# Altium PCB 移相器PCB1.PcbDoc
Units mil, origin at the board's own origin, x right, y up, seen from the top; angles counter-clockwise.
Board outline 2000 x 1150 mil, 2 copper layers (Top Layer, Bottom Layer); 29 components, 12 nets, 71 pads, 66 vias.
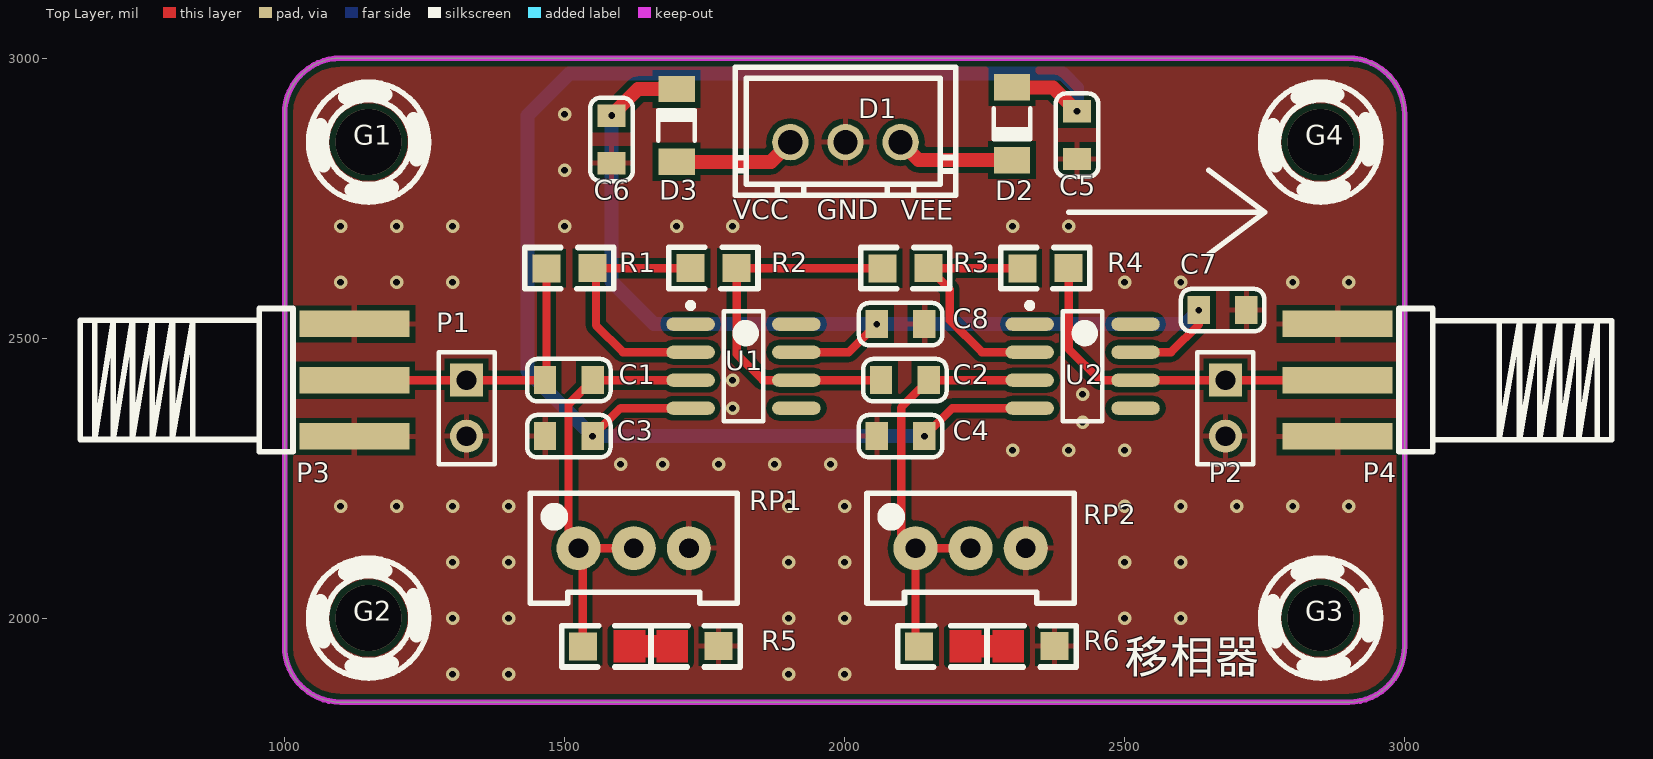
[diagram p0: Top Layer view]
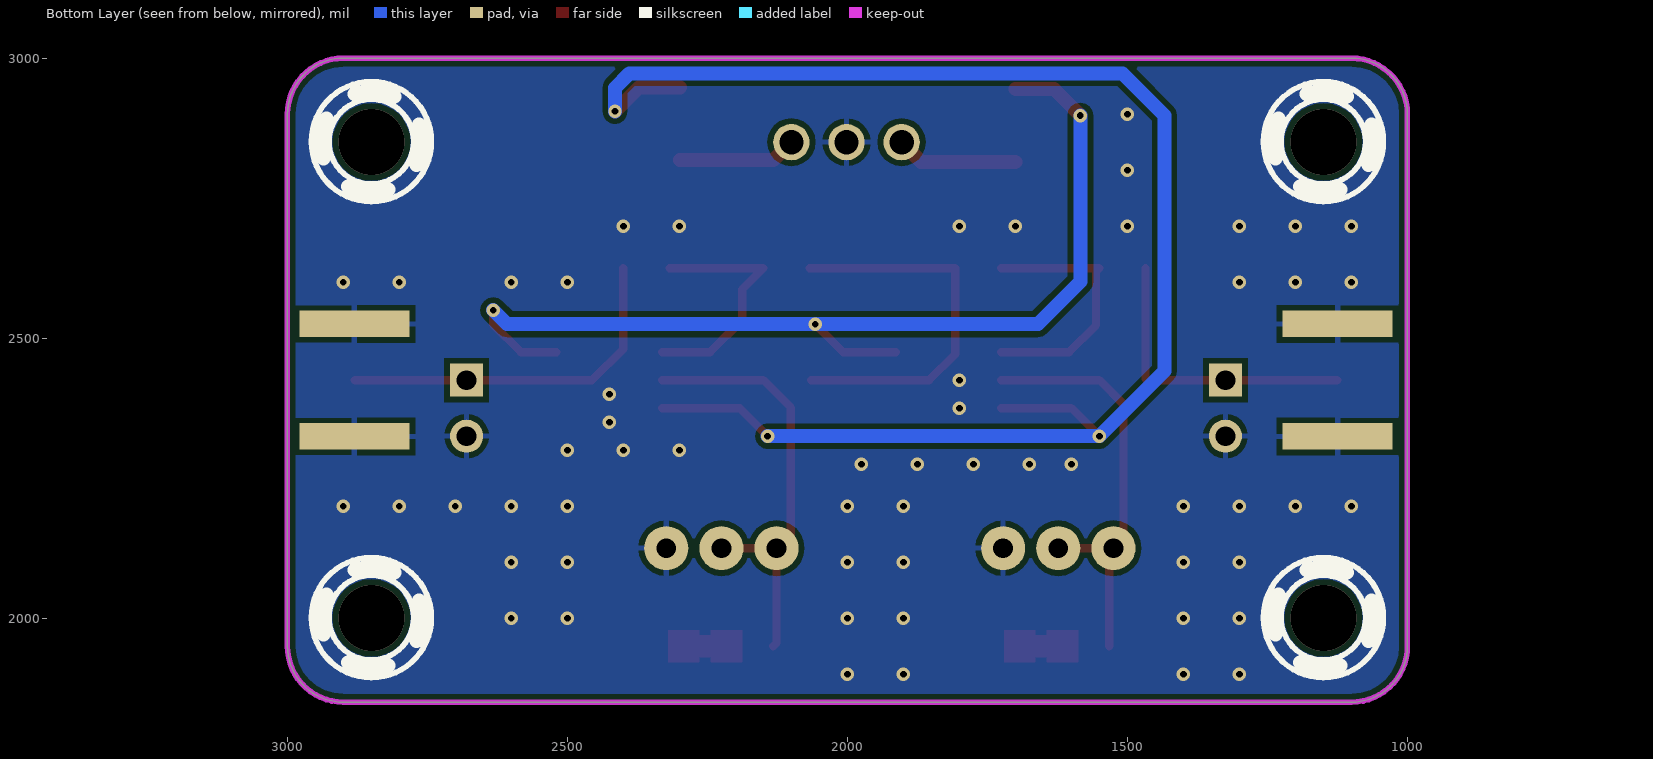
[diagram p1: Bottom Layer view, seen from below]

## Layer stack, top to bottom
Top Solder: solder mask 0.4, Solder Resist, Dk 3.5
Top Layer: signal copper 1.4
Dielectric 1: dielectric 12.6, FR-4, Dk 4.8
Bottom Layer: signal copper 1.4
Bottom Solder: solder mask 0.4, Solder Resist, Dk 3.5

## Board outline
1000,1950 1000,2900 cw(c1100,2900) 1100,3000 2900,3000 cw(c2900,2900) 3000,2900 3000,1950 cw(c2900,1950) 2900,1850 1100,1850 cw(c1100,1950)

## Design rules (kind name [scope] priority, off if disabled: settings)
Clearance [All] p1: gap=10 ignorepadtopadclearanceinfootprint=FALSE except(0: Arc-Hole Track-Hole SMDPad-Hole THPad-Hole Via-Hole Fill-Hole Poly-Hole Region-Hole Text-Hole)
PolygonConnect [All] p1: connectstyle=Relief reliefconductorwidth=10 reliefentries=4 polygonreliefangle="90 Angle" airgapwidth=10
RoutingVias [All] p1: holewidth=28 width=50 viastyle="Through Hole" minholewidth=28 minwidth=50 maxholewidth=28 maxwidth=50
SolderMaskExpansion [All] p1: expansion=4 istentingtop=FALSE
Width [All] p1: maxlimit=25 minlimit=15 preferedwidth=15
30 further rules are at their usual default settings.

## Components (designator, comment, footprint, x,y, rotation, side; value= is the part's Value field where it differs from the comment)
C1 "104" 电容0805 1507.5,2425 r180 top
C2 "104" 电容0805 2107.5,2425 r180 top
C3 "104" 电容0805 1507.5,2325 r0 top
C4 "104" 电容0805 2100,2325 r0 top
C5 "104" 电容0805 2415,2862.5 r90 top
C6 "104" 电容0805 1584,2855 r270 top
C7 "104" 电容0805 2675,2550 r0 top
C8 "104" 电容0805 2100,2525 r180 top
D1 "接线端子" CONN-TH_XH2.54-3P 2001.57,2850 r180 top
D2 "1N4150" DIOMELF3414N 2299,2883 r270 top
D3 "1N4150" DIOMELF3414N 1700,2879.96 r90 top
G1 "定位孔" 定位孔 1150,2850 r0 top
G2 "定位孔" 定位孔 1150,2000 r0 top
G3 "定位孔" 定位孔 2850,2000 r0 top
G4 "定位孔" 定位孔 2850,2850 r0 top
P1 "Header 2" HDR1X2 1325,2425 r270 top
P2 "Header 2" HDR1X2 2680,2425 r270 top
P3 "SMB" BWSMA-KE-P001 1125,2325.39 r180 top
P4 "SMB" BWSMA-KE-P001 2880,2524.61 r0 top
R1 "20K" 电阻0805 1550,2625 r180 top
R2 "20K" 电阻0805 1807.3,2625.2 r180 top
R3 "20K" 电阻0805 2150,2625 r180 top
R4 "20K" 电阻0805 2400,2625 r180 top
R5 "10K" 0805（两个串联式） 1532.7,1949.8 r0 top
R6 "10K" 0805（两个串联式） 2132.7,1949.8 r0 top
RP1 "10K" 电位器 1525,2125 r0 top
RP2 "10K" 电位器 2126.57,2125 r0 top
U1 "OP27" SOIC-8 1819.49,2450 r0 top
U2 "OP27" SOIC-8 2425,2450 r0 top

## Footprints (in the part's own frame and the unit in brackets; to place one, negate y for a bottom-side part, rotate by r counter-clockwise, add the part's x,y. Pads: shape width x height; smd on the part's side, far side on the other; paste and mask are expansions set on the pad)
0805（两个串联式） [mil]
  rect 50x50 smd: 1(0,0) 2(242.3,0.2)
  Top Layer region: 131,-29 188,-29 188,29 131,29
  Top Layer region: 55,-29 112,-29 112,29 55,29
  Top Layer region: 60,-20 180,-20 180,20 60,20
  silkscreen extent -38,-37 281,37, body extent 1,-24 240,25, height 22
BWSMA-KE-P001 [mm]
  rect 5x1.2 smd: 1(0,-2.53) 2(0,0.02) 2(0,-5.08)
  rect 5x1.2 smd far side: 2(0,0.02) 2(0,-5.08)
  silkscreen extent 2.79,-5.78 12.45,0.72
CONN-TH_XH2.54-3P [mm]
  round 1.65 hole 1.1: 1(-2.5,0) 2(0,0) 3(2.5,0)
  silkscreen extent -5,-3.4 5,2.4
DIOMELF3414N [mm] "MELF Diode, 2-Leads, Body 3.4x1.4mm, IPC Medium Density"
  rect 1.2x1.65 smd: 1(-1.65,0) 2(1.65,0)
  silkscreen extent -0.7,-0.83 0.7,0.82, body extent -1.8,-0.75 1.8,0.75, height 1.5
HDR1X2 [mm] "Connector; Header; 2 Position"
  rect 1.5x1.5 hole 0.9: 1(0,0)
  round 1.5 hole 0.9: 2(2.54,0)
  silkscreen extent -1.27,-1.27 3.81,1.27
SOIC-8 [mm] "SOIC, 8-Leads, Body 5.0x4.0mm (max), Pitch 1.27mm, IPC Medium Density"
  oval 2.2x0.6 smd: 1(-2.4,1.905) 2(-2.4,0.635) 3(-2.4,-0.635) 4(-2.4,-1.905) 5(2.4,-1.905) 6(2.4,-0.635) 7(2.4,0.635) 8(2.4,1.905)
  silkscreen extent -2.52,-2.5 0.9,2.88, body extent -2,-2.5 2,2.5, height 1.75
定位孔 [mil]
  silkscreen extent -107,-107 107,107
电位器 [mm]
  round 2 hole 0.9: 1(0,0) 2(2.5,0) 3(5,0)
  silkscreen extent -2.2,-2.5 7.2,2.5
电容0805 [mil]
  rect 40x50 smd: 1(-42.5,0) 2(42.5,0)
  silkscreen extent -75,-38 75,38, body extent -39,-25 39,25, height 30
电阻0805 [mil]
  rect 50x50 smd: 1(0,0) 2(82.3,0.2)
  silkscreen extent -38,-37 121,37, body extent 1,-24 80,25, height 22

## Part data
C1 C2 C3 C4 C5 C6 C7 C8: library part 无极性电容
D1: library part 3P接线端子
P1 P2: "Header, 2-Pin", LatestRevisionDate=17-Jul-2002, LatestRevisionNote="Re-released for DXP Platform.", Publisher="Altium Limited"
P3 P4: library part 天线座, "SMB Straight Connector", LatestRevisionDate=17-Jul-2002, LatestRevisionNote="Re-released for DXP Platform.", Publisher="Altium Limited"
R1 R2 R3 R4 R5 R6: library part 电阻
RP1 RP2: library part 电位器
U1 U2: library part OPA695

## Via types
v1: diameter 24, hole 12, Top Layer to Bottom Layer, 62 vias
v2: diameter 118.11/118.11 (per signal layer), hole 118.11, Top Layer to Bottom Layer, 4 vias

## Nets (pads, with @x,y where several pads share a name; then routed paths per layer and width w, separated by ;. In a path a pad name is that pad's centre, name@x,y a point inside that pad or via, vN(x,y) a via of type N, cw(c..) or ccw(c..) an arc to the next point about the centre after c; other vN are vias at no path point)
GND: C3.1 C4.1 C5.1 C6.2 C7.2 C8.1 D1.2 P1.2 P2.2 P3.2 P4.2 R5.2 R6.2 RP1.3 RP2.3
  other v1: 1300,1900 1400,1900 1900,1900 2000,1900 1300,2000 1400,2000 1900,2000 2000,2000 2500,2000 2600,2000 1300,2100 1400,2100 1900,2100 2000,2100 2500,2100 2600,2100 1100,2200 1200,2200 1300,2200 1400,2200 1900,2200 2000,2200 2500,2200 2600,2200 2700,2200 2800,2200 2900,2200 1600,2275 1675,2275 1775,2275 1875,2275 1975,2275 2300,2300 2400,2300 2500,2300 2425,2350 1800,2375 2425,2400 1800,2425 1100,2600 1200,2600 1300,2600 2500,2600 2600,2600 2800,2600 2900,2600 1100,2700 1200,2700 1300,2700 1500,2700 1700,2700 1800,2700 2300,2700 2400,2700 1500,2800 1500,2900
NetC1_1: C1.1 R5.1 RP1.1 RP1.2 U1.3 | length 777.1
  Top Layer w15: R5.1 1532.7,2117.3 RP1.1 ; RP1.2 RP1.1 ; U1.3 C1.1 1507,2382 1507,2143 RP1.1
NetC1_2: C1.2 P1.1 P3.1 R1.2 | length 540.9
  Top Layer w15: P3.1 P1.1 C1.2 1467.7,2427.7 R1.2
NetC2_1: C2.1 R6.1 RP2.1 RP2.2 U2.3 | length 787.6
  Top Layer w15: R6.1 2126.57,1955.93 RP2.1 ; RP2.2 RP2.1 ; U2.3 C2.1 2101,2376 2101,2150.57 RP2.1
NetC2_2: C2.2 R2.1 R3.2 U1.6 | length 691.1
  Top Layer w15: C2.2 U1.6 1854,2425 1807.3,2471.7 R2.1 1807.7,2624.8 R3.2
NetD1_1: D1.1 D2.2 | length 212.2
  Top Layer w25: D1.1 2131.96,2818.04 D2.2
NetD1_3: D1.3 D3.1 | length 217.6
  Top Layer w25: D3.1 1868.15,2815 D1.3
NetP2_1: P2.1 P4.1 R4.1 U2.6 | length 647.2
  Top Layer w15: R4.1 2400,2481 2456,2425 U2.6 P2.1 P4.1
NetR1_1: R1.1 R2.2 U1.2 | length 468.4
  Top Layer w15: U1.2 1604,2475 1556,2523 1556,2619 R1.1 R2.2
NetR3_1: R3.1 R4.2 U2.2 | length 442.6
  Top Layer w15: R4.2 2150.2,2624.8 R3.1 2188,2587 2188,2532 2245,2475 U2.2
VCC: C6.1 C7.1 C8.2 D3.2 U1.7 U2.7 | length 1845.7
  Top Layer w15: U1.7 2007.5,2475 v1(2057.5,2525) ; U2.7 2583,2475 2632.5,2524.5 v1(2632.5,2550)
  Top Layer w25: v1(1584,2897.5) 1631.42,2944.92 D3.2
  Bottom Layer w25: v1(1584,2897.5) 1584,2601 1660,2525 v1(2057.5,2525) 2607.5,2525 v1(2632.5,2550)
VEE: C3.2 C4.2 C5.2 D2.1 U1.4 U2.4 | length 2816.2
  Top Layer w15: v1(1550,2325) 1600,2375 U1.4 ; v1(2142.5,2325) 2192.5,2375 U2.4
  Top Layer w25: D2.1 2372.04,2947.96 v1(2415,2905)
  Bottom Layer w25: v1(2142.5,2325) v1(1550,2325) 1434,2441 1434,2898 1508.5,2972.5 2389.5,2972.5 2415,2947 v1(2415,2905)
pads on no net: U1.1 U1.5 U1.8 U2.1 U2.5 U2.8
copper on no net:
  other v2: 1149.74,2000.44 2849.74,2000.44 1149.74,2850.44 2849.74,2850.44

## Polygon pours and split planes (outlines as drawn)
GND on Bottom Layer "GND_L02_P000" (solid, remove dead copper, pour order 0): 1000,3000 1000,1850 3000,1850 3000,3000
GND on Top Layer "GND_L01_P001" (solid, remove dead copper, pour order 1): 1000,3000 1000,1850 3000,1850 3000,3000

## Keep-outs
Keep-Out Layer:
  the board outline again, w10

## Silkscreen, mask and mechanical layers (free items; w line width, h text height)
Top Overlay:
  lines w10: 2400,2725 2750,2725 ; 2650,2650 2750,2725 ; 2750,2725 2650,2800 2750,2725
  text "VCC" at 1800,2700.64 h60
  text "GND" at 1950,2700.64 h60
  text "VEE" at 2100,2700 h60
  text "移相器" at 2500.07,1883.35 h100